# Altium PCB PCB1.PcbDoc
Units mm, origin at the board's own origin, x right, y up, seen from the top; angles counter-clockwise.
Board outline 64 x 26 mm, 2 copper layers (Top Layer, Bottom Layer); 3 components, 38 nets, 82 pads, 0 vias.
Unrouted connection lines stored in the file: 2.
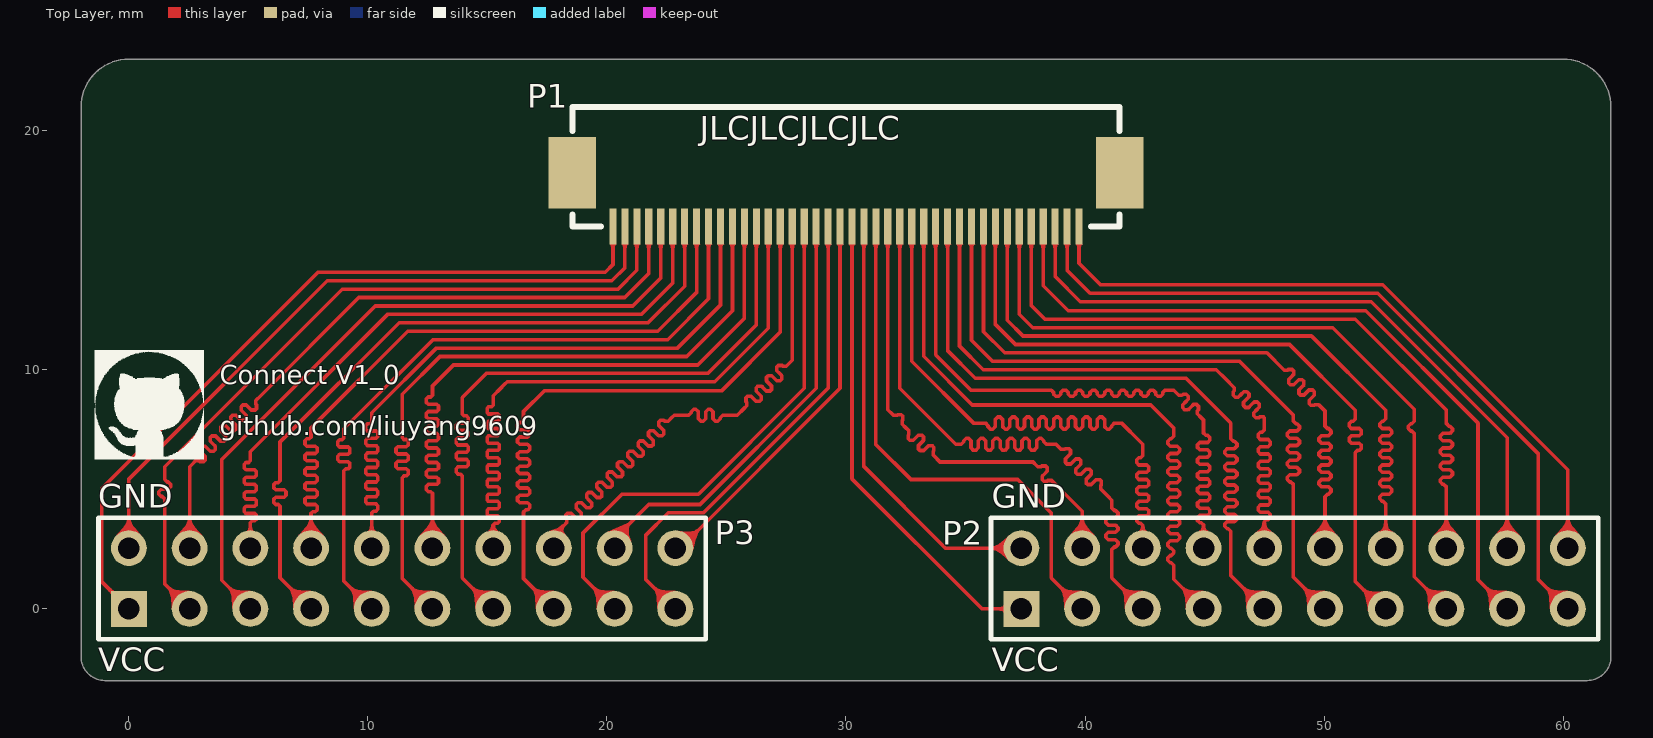
[diagram p0: Top Layer view]
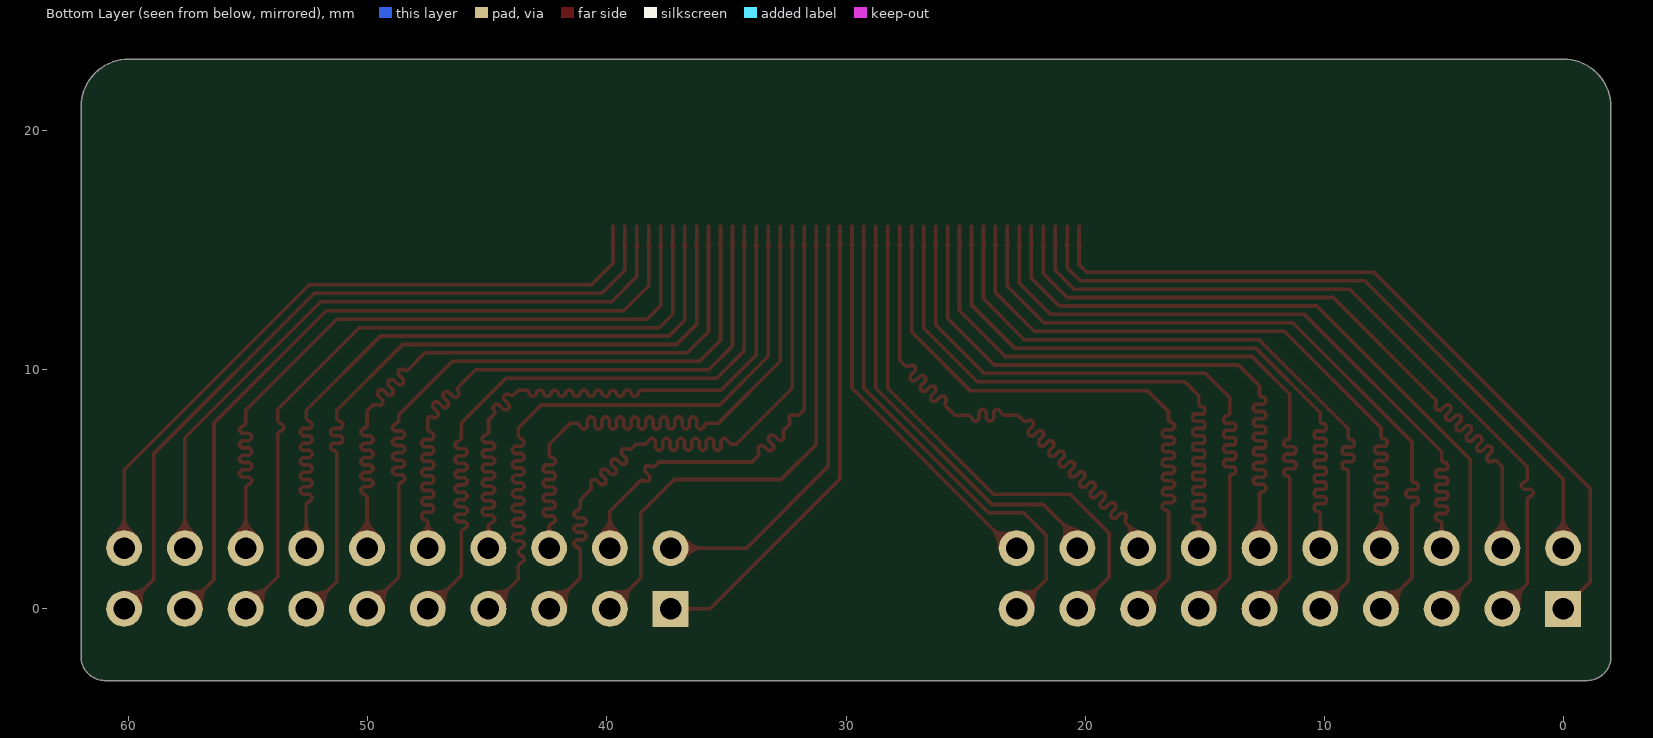
[diagram p1: Bottom Layer view, seen from below]

## Layer stack, top to bottom
Top Solder: solder mask 0.0102, Solder Resist, Dk 3.5
Top Layer: signal copper 0.0356
Dielectric 1: dielectric 0.32, FR-4, Dk 4.8
Bottom Layer: signal copper 0.0356
Bottom Solder: solder mask 0.0102, Solder Resist, Dk 3.5

## Board outline
-1,-3 cw(c-1,-2) -2,-2 -2,21 cw(c0,21) 0,23 60,23 cw(c60,21) 62,21 62,-2 cw(c61,-2) 61,-3

## Design rules (kind name [scope] priority, off if disabled: settings)
Clearance [All] p1: gap=0.2
Length LengthClass4 [InNetClass('Class4')] p1: maxlimit=23 minlimit=22
Length LengthClass3 [InNetClass('Class3')] p2: maxlimit=32 minlimit=31
Length LengthClass2 [InNetClass('Class2')] p3: maxlimit=33 minlimit=32
Length LengthClass1 [InNetClass('Class1')] p4: maxlimit=31 minlimit=30
PolygonConnect [All] p1: connectstyle=Relief reliefconductorwidth=0.254 reliefentries=4 polygonreliefangle="90 Angle" airgapwidth=0.254
RoutingVias [All] p1: holewidth=0.6 width=1 viastyle="Through Hole" minholewidth=0.711 minwidth=1.27 maxholewidth=0.711 maxwidth=1.27
SolderMaskExpansion [All] p1: expansion=0.102
Width [All] p1: maxlimit=0.762 minlimit=0.127 preferedwidth=0.152
30 further rules are at their usual default settings.

## Classes and differential pairs
net class Class1: LEFT_D0 LEFT_D1 LEFT_D2 LEFT_D3 LEFT_D4 LEFT_D5 LEFT_D6 LEFT_D7 LEFT_HREF LEFT_PCLK LEFT_SYNC LEFT_XCLK
net class Class2: LEFT_SCL LEFT_SDA
net class Class3: RIGHT_D0 RIGHT_D1 RIGHT_D2 RIGHT_D3 RIGHT_D4 RIGHT_D5 RIGHT_D6 RIGHT_D7 RIGHT_HREF RIGHT_PCLK RIGHT_SYNC RIGHT_XCLK
net class Class4: RIGHT_SCL RIGHT_SDA

## Components (designator, comment, footprint, x,y, rotation, side; value= is the part's Value field where it differs from the comment)
P1 "Header 20X2" FPC_40pin_05mm 20.25,16 r0 top
P2 "Header 10X2" HDR2X10 37.338,0 r0 top
P3 "Header 10X2" HDR2X10 0,0 r0 top

## Footprints (in the part's own frame and the unit in brackets; to place one, negate y for a bottom-side part, rotate by r counter-clockwise, add the part's x,y. Pads: shape width x height; smd on the part's side, far side on the other; paste and mask are expansions set on the pad)
FPC_40pin_05mm [mm]
  rect 2x3 smd: 0(-1.7,2.25) 0(21.2,2.25)
  rect 0.3x1.5 smd: 1(0,0) 2(0.5,0) 3(1,0) 4(1.5,0) 5(2,0) 6(2.5,0) 7(3,0) 8(3.5,0) 9(4,0) 10(4.5,0) 11(5,0) 12(5.5,0) 13(6,0) 14(6.5,0) 15(7,0) 16(7.5,0) 17(8,0) 18(8.5,0) 19(9,0) 20(9.5,0) 21(10,0) 22(10.5,0) 23(11,0) 24(11.5,0) 25(12,0) 26(12.5,0) 27(13,0) 28(13.5,0) 29(14,0) 30(14.5,0) 31(15,0) 32(15.5,0) 33(16,0) 34(16.5,0) 35(17,0) 36(17.5,0) 37(18,0) 38(18.5,0) 39(19,0) 40(19.5,0)
  silkscreen extent -1.7,0 21.2,5
HDR2X10 [mm] "Connector; Header; 10x2 Position"
  rect 1.5x1.5 hole 0.9: 1(0,0)
  round 1.5 hole 0.9: 2(0,2.54) 3(2.54,0) 4(2.54,2.54) 5(5.08,0) 6(5.08,2.54) 7(7.62,0) 8(7.62,2.54) 9(10.16,0) 10(10.16,2.54) 11(12.7,0) 12(12.7,2.54) 13(15.24,0) 14(15.24,2.54) 15(17.78,0) 16(17.78,2.54) 17(20.32,0) 18(20.32,2.54) 19(22.86,0) 20(22.86,2.54)
  silkscreen extent -1.27,-1.27 24.13,3.81

## Part data
P1: "Header, 20-Pin, Dual row"
P2 P3: "Header, 10-Pin, Dual row"

## Nets (pads, with @x,y where several pads share a name; then routed paths per layer and width w, separated by ;. In a path a pad name is that pad's centre, name@x,y a point inside that pad or via, vN(x,y) a via of type N, cw(c..) or ccw(c..) an arc to the next point about the centre after c; other vN are vias at no path point)
LEFT_D0: P1.16 P3.16 | length 30.3
  Top Layer w0.152: P3.16 17.78,3.073 18.186,3.48 18.315,3.609 18.315,3.76 18.287,3.788 18.287,3.939 18.351,4.004 18.502,4.004 18.606,3.9 18.711,3.796 18.861,3.796 18.926,3.86 18.926,4.011 18.822,4.115 18.718,4.22 18.718,4.37 18.782,4.435 18.933,4.435 19.037,4.331 19.142,4.227 19.293,4.227 19.357,4.291 19.357,4.442 19.253,4.546 19.149,4.651 19.149,4.801 19.214,4.866 19.364,4.866 19.469,4.762 19.573,4.658 19.724,4.658 19.788,4.722 19.788,4.873 19.684,4.977 19.58,5.082 19.58,5.233 19.645,5.297 19.795,5.297 19.9,5.193 20.004,5.089 20.155,5.089 20.219,5.153 20.219,5.304 20.115,5.409 20.011,5.513 20.011,5.664 20.076,5.728 20.226,5.728 20.331,5.624 20.435,5.52 20.586,5.52 20.65,5.585 20.65,5.735 20.546,5.84 20.442,5.944 20.442,6.095 20.507,6.159 20.658,6.159 20.762,6.055 20.866,5.951 21.017,5.951 21.081,6.016 21.081,6.166 20.977,6.271 20.873,6.375 20.873,6.526 20.938,6.59 21.089,6.59 21.193,6.486 21.297,6.382 21.448,6.382 21.512,6.447 21.512,6.598 21.408,6.702 21.304,6.806 21.304,6.957 21.369,7.021 21.52,7.021 21.624,6.917 21.728,6.813 21.879,6.813 21.944,6.878 21.944,7.029 21.839,7.133 21.735,7.237 21.735,7.388 21.8,7.452 21.951,7.452 22.055,7.348 22.159,7.244 22.31,7.244 22.375,7.309 22.375,7.46 22.27,7.564 22.166,7.668 22.166,7.819 22.231,7.883 22.382,7.883 22.41,7.855 22.561,7.855 22.701,7.995 22.809,8.103 23.368,8.103 23.414,8.103 23.52,8.209 23.52,8.25 23.627,8.357 23.719,8.357 23.825,8.25 23.825,8.103 23.825,7.955 23.932,7.849 24.023,7.849 24.13,7.955 24.13,8.103 24.13,8.25 24.237,8.357 24.328,8.357 24.435,8.25 24.435,8.103 24.435,7.955 24.541,7.849 24.633,7.849 24.74,7.955 24.74,7.996 24.846,8.103 25.121,8.103 25.451,8.103 25.73,8.382 25.843,8.494 25.843,8.645 25.814,8.674 25.814,8.825 25.879,8.89 26.029,8.89 26.134,8.785 26.238,8.681 26.389,8.681 26.453,8.746 26.453,8.897 26.349,9.001 26.245,9.105 26.245,9.256 26.31,9.321 26.46,9.321 26.565,9.216 26.669,9.112 26.82,9.112 26.884,9.177 26.884,9.328 26.78,9.432 26.676,9.536 26.676,9.687 26.741,9.752 26.891,9.752 26.996,9.647 27.1,9.543 27.251,9.543 27.315,9.608 27.315,9.759 27.211,9.863 27.107,9.967 27.107,10.118 27.172,10.183 27.323,10.183 27.351,10.154 27.502,10.154 27.642,10.294 27.75,10.402 P1.16
LEFT_D1: P1.15 P3.15 | length 30
  Top Layer w0.152: P3.15 16.51,1.27 16.51,2.667 16.51,4.049 16.601,4.14 16.673,4.14 16.764,4.232 16.764,4.354 16.673,4.445 16.51,4.445 16.347,4.445 16.256,4.536 16.256,4.658 16.347,4.75 16.51,4.75 16.673,4.75 16.764,4.841 16.764,4.963 16.673,5.055 16.51,5.055 16.347,5.055 16.256,5.146 16.256,5.268 16.347,5.359 16.51,5.359 16.673,5.359 16.764,5.451 16.764,5.573 16.673,5.664 16.51,5.664 16.347,5.664 16.256,5.756 16.256,5.878 16.347,5.969 16.51,5.969 16.673,5.969 16.764,6.06 16.764,6.182 16.673,6.274 16.51,6.274 16.347,6.274 16.256,6.365 16.256,6.487 16.347,6.579 16.51,6.579 16.673,6.579 16.764,6.67 16.764,6.792 16.673,6.883 16.51,6.883 16.347,6.883 16.256,6.975 16.256,7.097 16.347,7.188 16.51,7.188 16.673,7.188 16.764,7.28 16.764,7.402 16.673,7.493 16.51,7.493 16.347,7.493 16.256,7.584 16.256,7.706 16.347,7.798 16.419,7.798 16.51,7.889 16.51,8.103 16.51,8.255 17.374,9.119 24.79,9.119 27.25,11.578 P1.15
LEFT_D2: P1.14 P3.14 | length 30.2
  Top Layer w0.152: P3.14 15.24,3.099 15.24,3.52 15.301,3.581 15.433,3.581 15.494,3.642 15.494,3.825 15.433,3.886 15.24,3.886 15.047,3.886 14.986,3.947 14.986,4.13 15.047,4.191 15.24,4.191 15.433,4.191 15.494,4.252 15.494,4.435 15.433,4.496 15.24,4.496 15.047,4.496 14.986,4.557 14.986,4.74 15.047,4.801 15.24,4.801 15.433,4.801 15.494,4.862 15.494,5.044 15.433,5.105 15.24,5.105 15.047,5.105 14.986,5.166 14.986,5.349 15.047,5.41 15.24,5.41 15.433,5.41 15.494,5.471 15.494,5.654 15.433,5.715 15.24,5.715 15.047,5.715 14.986,5.776 14.986,5.959 15.047,6.02 15.24,6.02 15.433,6.02 15.494,6.081 15.494,6.264 15.433,6.325 15.24,6.325 15.047,6.325 14.986,6.386 14.986,6.568 15.047,6.629 15.24,6.629 15.433,6.629 15.494,6.69 15.494,6.873 15.433,6.934 15.24,6.934 15.047,6.934 14.986,6.995 14.986,7.178 15.047,7.239 15.24,7.239 15.433,7.239 15.494,7.3 15.494,7.483 15.433,7.544 15.24,7.544 15.047,7.544 14.986,7.605 14.986,7.788 15.047,7.849 15.24,7.849 15.433,7.849 15.494,7.91 15.494,8.092 15.433,8.153 15.24,8.153 15.047,8.153 14.986,8.214 14.986,8.397 15.047,8.458 15.179,8.458 15.24,8.519 15.24,8.763 15.24,8.915 15.285,8.961 15.501,9.176 15.716,9.392 15.824,9.5 24.511,9.5 26.75,11.739 P1.14
LEFT_D3: P1.13 P3.13 | length 30.3
  Top Layer w0.152: P3.13 13.945,1.295 13.945,2.21 13.945,5.563 13.868,5.639 13.767,5.639 13.691,5.715 13.691,5.867 13.767,5.944 13.945,5.944 14.122,5.944 14.199,6.02 14.199,6.172 14.122,6.248 13.945,6.248 13.767,6.248 13.691,6.325 13.691,6.477 13.767,6.553 13.945,6.553 14.122,6.553 14.199,6.629 14.199,6.782 14.122,6.858 13.945,6.858 13.767,6.858 13.691,6.934 13.691,7.087 13.767,7.163 13.945,7.163 14.122,7.163 14.199,7.239 14.199,7.391 14.122,7.468 13.945,7.468 13.767,7.468 13.691,7.544 13.691,7.696 13.767,7.772 13.945,7.772 14.122,7.772 14.199,7.849 14.199,8.001 14.122,8.077 14.021,8.077 13.945,8.153 13.945,8.382 13.945,8.687 13.945,8.839 14.957,9.852 24.228,9.852 26.25,11.874 P1.13
LEFT_D4: P1.12 P3.12 | length 30.2
  Top Layer w0.152: P3.12 12.7,3.835 12.7,4.826 12.624,4.902 12.522,4.902 12.446,4.978 12.446,5.131 12.522,5.207 12.7,5.207 12.878,5.207 12.954,5.283 12.954,5.436 12.878,5.512 12.7,5.512 12.522,5.512 12.446,5.588 12.446,5.74 12.522,5.817 12.7,5.817 12.878,5.817 12.954,5.893 12.954,6.045 12.878,6.121 12.7,6.121 12.522,6.121 12.446,6.198 12.446,6.35 12.522,6.426 12.7,6.426 12.878,6.426 12.954,6.502 12.954,6.655 12.878,6.731 12.7,6.731 12.522,6.731 12.446,6.807 12.446,6.96 12.522,7.036 12.7,7.036 12.878,7.036 12.954,7.112 12.954,7.264 12.878,7.341 12.7,7.341 12.522,7.341 12.446,7.417 12.446,7.569 12.522,7.645 12.7,7.645 12.878,7.645 12.954,7.722 12.954,7.874 12.878,7.95 12.7,7.95 12.522,7.95 12.446,8.026 12.446,8.179 12.522,8.255 12.7,8.255 12.878,8.255 12.954,8.331 12.954,8.484 12.878,8.56 12.7,8.56 12.522,8.56 12.446,8.636 12.446,8.788 12.522,8.865 12.624,8.865 12.7,8.941 12.7,9.169 12.7,9.322 13.583,10.204 23.793,10.204 25.75,12.161 P1.12
LEFT_D5: P1.11 P3.11 | length 30.3
  Top Layer w0.152: P3.11 11.43,1.27 11.43,4.013 11.43,5.486 11.506,5.563 11.608,5.563 11.684,5.639 11.684,5.791 11.608,5.867 11.43,5.867 11.252,5.867 11.176,5.944 11.176,6.096 11.252,6.172 11.43,6.172 11.608,6.172 11.684,6.248 11.684,6.401 11.608,6.477 11.43,6.477 11.252,6.477 11.176,6.553 11.176,6.706 11.252,6.782 11.43,6.782 11.608,6.782 11.684,6.858 11.684,7.01 11.608,7.087 11.506,7.087 11.43,7.163 11.43,7.239 11.43,8.973 13.014,10.557 23.333,10.557 25.25,12.474 P1.11
LEFT_D6: P1.10 P3.10 | length 30.3
  Top Layer w0.152: P3.10 10.16,3.429 10.16,4.011 10.236,4.087 10.338,4.087 10.414,4.163 10.414,4.315 10.338,4.392 10.16,4.392 9.982,4.392 9.906,4.468 9.906,4.62 9.982,4.696 10.16,4.696 10.338,4.696 10.414,4.773 10.414,4.925 10.338,5.001 10.16,5.001 9.982,5.001 9.906,5.077 9.906,5.23 9.982,5.306 10.16,5.306 10.338,5.306 10.414,5.382 10.414,5.535 10.338,5.611 10.16,5.611 9.982,5.611 9.906,5.687 9.906,5.839 9.982,5.916 10.16,5.916 10.338,5.916 10.414,5.992 10.414,6.144 10.338,6.22 10.16,6.22 9.982,6.22 9.906,6.297 9.906,6.449 9.982,6.525 10.16,6.525 10.338,6.525 10.414,6.601 10.414,6.754 10.338,6.83 10.16,6.83 9.982,6.83 9.906,6.906 9.906,7.059 9.982,7.135 10.16,7.135 10.338,7.135 10.414,7.211 10.414,7.363 10.338,7.44 10.16,7.44 9.982,7.44 9.906,7.516 9.906,7.668 9.982,7.744 10.084,7.744 10.16,7.821 10.16,8.049 10.16,8.202 12.868,10.909 22.949,10.909 24.75,12.71 P1.10
LEFT_D7: P1.9 P3.9 | length 30.1
  Top Layer w0.152: P3.9 8.992,1.168 8.992,2.718 8.992,5.779 9.068,5.855 9.169,5.855 9.246,5.931 9.246,6.084 9.169,6.16 8.992,6.16 8.814,6.16 8.738,6.236 8.738,6.389 8.814,6.465 8.992,6.465 9.169,6.465 9.246,6.541 9.246,6.693 9.169,6.77 8.992,6.77 8.814,6.77 8.738,6.846 8.738,6.998 8.814,7.074 8.915,7.074 8.992,7.151 8.992,7.379 8.992,7.532 12.722,11.262 22.539,11.262 24.25,12.972 P1.9
LEFT_GND: P1.2 P1.17 P3.2 P3.17 | length 51.3
  Top Layer w0.152: P3.2 0,5.436 8.293,13.728 20.205,13.728 20.75,14.273 P1.2 ; P3.17 18.999,1.321 18.999,3.175 20.625,4.801 23.825,4.801 28.25,9.225 P1.17
LEFT_HREF: P1.6 P3.6 | length 30.3
  Top Layer w0.152: P3.6 5.08,3.404 5.08,3.607 5.156,3.683 5.258,3.683 5.334,3.759 5.334,3.912 5.258,3.988 5.08,3.988 4.902,3.988 4.826,4.064 4.826,4.216 4.902,4.293 5.08,4.293 5.258,4.293 5.334,4.369 5.334,4.521 5.258,4.597 5.08,4.597 4.902,4.597 4.826,4.674 4.826,4.826 4.902,4.902 5.08,4.902 5.258,4.902 5.334,4.978 5.334,5.131 5.258,5.207 5.08,5.207 4.902,5.207 4.826,5.283 4.826,5.436 4.902,5.512 5.08,5.512 5.258,5.512 5.334,5.588 5.334,5.74 5.258,5.817 5.08,5.817 4.902,5.817 4.826,5.893 4.826,6.045 4.902,6.121 5.004,6.121 5.08,6.198 5.08,6.426 5.08,6.579 10.82,12.319 21.437,12.319 22.75,13.631 P1.6
LEFT_NC1: P1.18 P3.18 | length 18.2
  Top Layer w0.152: P3.18 20.32,2.946 21.742,4.369 23.892,4.369 28.75,9.227 P1.18
LEFT_NC2: P1.19 P3.19 | length 20.5
  Top Layer w0.152: P3.19 21.615,1.245 21.615,3.073 22.558,4.016 24.038,4.016 29.25,9.229 P1.19
LEFT_NC3: P1.20 P3.20 | length 16.4
  Top Layer w0.152: P3.20 23.063,2.54 29.75,9.227 P1.20
LEFT_PCLK: P1.7 P3.7 | length 30.8
  Top Layer w0.152: P3.7 6.321,1.299 6.321,2.54 6.321,4.293 6.245,4.369 6.143,4.369 6.067,4.445 6.067,4.597 6.143,4.674 6.321,4.674 6.499,4.674 6.575,4.75 6.575,4.902 6.499,4.978 6.321,4.978 6.143,4.978 6.067,5.055 6.067,5.207 6.143,5.283 6.245,5.283 6.321,5.359 6.321,5.588 6.321,5.74 6.321,6.982 11.306,11.966 21.72,11.966 23.25,13.496 P1.7
LEFT_SCL: P1.3 P3.3 | length 32
  Top Layer w0.152: P3.3 1.499,1.041 1.499,3.708 1.499,4.592 1.392,4.699 1.351,4.699 1.245,4.806 1.245,4.897 1.351,5.004 1.499,5.004 1.646,5.004 1.753,5.11 1.753,5.202 1.646,5.309 1.605,5.309 1.499,5.415 1.499,5.461 1.499,5.944 8.931,13.376 20.463,13.376 21.25,14.163 P1.3
LEFT_SDA: P1.4 P3.4 | length 32
  Top Layer w0.152: P3.4 2.54,5.944 2.648,6.051 2.788,6.191 2.939,6.191 2.967,6.163 3.118,6.163 3.183,6.227 3.183,6.378 3.079,6.482 2.975,6.587 2.975,6.737 3.039,6.802 3.19,6.802 3.294,6.698 3.399,6.594 3.549,6.594 3.614,6.658 3.614,6.809 3.51,6.913 3.406,7.018 3.406,7.169 3.47,7.233 3.621,7.233 3.725,7.129 3.83,7.025 3.98,7.025 4.045,7.089 4.045,7.24 3.941,7.345 3.837,7.449 3.837,7.6 3.901,7.664 4.052,7.664 4.156,7.56 4.261,7.456 4.411,7.456 4.476,7.521 4.476,7.671 4.372,7.776 4.268,7.88 4.268,8.031 4.332,8.095 4.483,8.095 4.587,7.991 4.692,7.887 4.843,7.887 4.907,7.952 4.907,8.102 4.803,8.207 4.699,8.311 4.699,8.462 4.764,8.526 4.914,8.526 5.019,8.422 5.123,8.318 5.274,8.318 5.338,8.383 5.338,8.534 5.31,8.562 5.31,8.713 5.512,8.915 9.62,13.024 20.745,13.024 21.75,14.028 P1.4
LEFT_SYNC: P1.5 P3.5 | length 30.4
  Top Layer w0.152: P3.5 3.886,1.194 3.886,6.248 10.309,12.671 21.079,12.671 22.25,13.843 P1.5
LEFT_VCC: P1.1 P3.1 | length 32.4
  Top Layer w0.152: P3.1 -1.143,1.143 -1.143,5.029 7.909,14.081 19.923,14.081 20.25,14.408 P1.1
LEFT_XCLK: P1.8 P3.8 | length 30.4
  Top Layer w0.152: P3.8 7.62,3.226 7.62,3.988 7.696,4.064 7.798,4.064 7.874,4.14 7.874,4.293 7.798,4.369 7.62,4.369 7.442,4.369 7.366,4.445 7.366,4.597 7.442,4.674 7.62,4.674 7.798,4.674 7.874,4.75 7.874,4.902 7.798,4.978 7.62,4.978 7.442,4.978 7.366,5.055 7.366,5.207 7.442,5.283 7.62,5.283 7.798,5.283 7.874,5.359 7.874,5.512 7.798,5.588 7.62,5.588 7.442,5.588 7.366,5.664 7.366,5.817 7.442,5.893 7.62,5.893 7.798,5.893 7.874,5.969 7.874,6.121 7.798,6.198 7.62,6.198 7.442,6.198 7.366,6.274 7.366,6.426 7.442,6.502 7.62,6.502 7.798,6.502 7.874,6.579 7.874,6.731 7.798,6.807 7.62,6.807 7.442,6.807 7.366,6.883 7.366,7.036 7.442,7.112 7.544,7.112 7.62,7.188 7.62,7.417 7.62,7.569 11.665,11.614 22.13,11.614 23.75,13.234 P1.8
RIGHT_D0: P1.36 P2.16 | length 31.2
  Top Layer w0.152: P1.36 37.75,12.694 38.326,12.119 51.305,12.119 55.118,8.306 55.118,7.798 55.118,7.752 55.225,7.645 55.265,7.645 55.372,7.539 55.372,7.447 55.265,7.341 55.118,7.341 54.971,7.341 54.864,7.234 54.864,7.142 54.971,7.036 55.118,7.036 55.265,7.036 55.372,6.929 55.372,6.838 55.265,6.731 55.118,6.731 54.971,6.731 54.864,6.624 54.864,6.533 54.971,6.426 55.118,6.426 55.265,6.426 55.372,6.32 55.372,6.228 55.265,6.121 55.118,6.121 54.971,6.121 54.864,6.015 54.864,5.923 54.971,5.817 55.118,5.817 55.265,5.817 55.372,5.71 55.372,5.618 55.265,5.512 55.118,5.512 54.971,5.512 54.864,5.405 54.864,5.314 54.971,5.207 55.011,5.207 55.118,5.1 55.118,4.267 P2.16
RIGHT_D1: P1.35 P2.15 | length 31
  Top Layer w0.152: P1.35 37.25,12.331 37.814,11.766 50.362,11.766 53.772,8.357 53.772,8.204 53.772,8.052 53.772,7.854 53.665,7.747 53.624,7.747 53.518,7.64 53.518,7.549 53.624,7.442 53.665,7.442 53.772,7.336 53.772,5.207 53.772,1.346 P2.15
RIGHT_D2: P1.34 P2.14 | length 31.2
  Top Layer w0.152: P1.34@36.75,16 36.75,12.069 37.405,11.414 49.47,11.414 52.578,8.306 52.578,8.153 52.578,7.955 52.471,7.849 52.431,7.849 52.324,7.742 52.324,7.65 52.431,7.544 52.578,7.544 52.725,7.544 52.832,7.437 52.832,7.346 52.725,7.239 52.578,7.239 52.431,7.239 52.324,7.132 52.324,7.041 52.431,6.934 52.578,6.934 52.725,6.934 52.832,6.828 52.832,6.736 52.725,6.629 52.578,6.629 52.431,6.629 52.324,6.523 52.324,6.431 52.431,6.325 52.578,6.325 52.725,6.325 52.832,6.218 52.832,6.126 52.725,6.02 52.578,6.02 52.431,6.02 52.324,5.913 52.324,5.822 52.431,5.715 52.578,5.715 52.725,5.715 52.832,5.608 52.832,5.517 52.725,5.41 52.578,5.41 52.431,5.41 52.324,5.304 52.324,5.212 52.431,5.105 52.578,5.105 52.725,5.105 52.832,4.999 52.832,4.907 52.725,4.801 52.578,4.801 52.431,4.801 52.324,4.694 52.324,4.602 52.431,4.496 52.471,4.496 52.578,4.389 52.578,3.556 P2.14
RIGHT_D3: P1.33 P2.13 | length 31.1
  Top Layer w0.152: P1.33 36.25,11.899 37.087,11.062 48.552,11.062 51.308,8.306 51.308,8.153 51.308,7.94 51.217,7.849 51.145,7.849 51.054,7.757 51.054,7.635 51.145,7.544 51.308,7.544 51.471,7.544 51.562,7.452 51.562,7.33 51.471,7.239 51.308,7.239 51.145,7.239 51.054,7.148 51.054,7.026 51.145,6.934 51.308,6.934 51.471,6.934 51.562,6.843 51.562,6.721 51.471,6.629 51.399,6.629 51.308,6.538 51.308,4.648 51.308,1.143 52.451,0 P2.13
RIGHT_D4: P1.32 P2.12 | length 31.3
  Top Layer w0.152: P1.32 35.75,11.596 36.636,10.709 47.609,10.709 48.298,10.02 48.33,9.988 48.481,9.988 48.51,10.017 48.661,10.017 48.726,9.952 48.726,9.801 48.621,9.697 48.517,9.593 48.517,9.442 48.582,9.377 48.733,9.377 48.837,9.481 48.941,9.586 49.092,9.586 49.157,9.521 49.157,9.37 49.052,9.266 48.948,9.162 48.948,9.011 49.013,8.946 49.164,8.946 49.268,9.05 49.372,9.155 49.523,9.155 49.588,9.09 49.588,8.939 49.483,8.835 49.379,8.731 49.379,8.58 49.444,8.515 49.595,8.515 49.624,8.544 49.774,8.544 49.809,8.509 50.038,8.28 50.038,7.696 50.038,7.65 50.145,7.544 50.185,7.544 50.292,7.437 50.292,7.346 50.185,7.239 50.038,7.239 49.891,7.239 49.784,7.132 49.784,7.041 49.891,6.934 50.038,6.934 50.185,6.934 50.292,6.828 50.292,6.736 50.185,6.629 50.038,6.629 49.891,6.629 49.784,6.523 49.784,6.431 49.891,6.325 50.038,6.325 50.185,6.325 50.292,6.218 50.292,6.126 50.185,6.02 50.038,6.02 49.891,6.02 49.784,5.913 49.784,5.822 49.891,5.715 50.038,5.715 50.185,5.715 50.292,5.608 50.292,5.517 50.185,5.41 50.038,5.41 49.891,5.41 49.784,5.304 49.784,5.212 49.891,5.105 50.038,5.105 50.185,5.105 50.292,4.999 50.292,4.907 50.185,4.801 50.145,4.801 50.038,4.694 50.038,4.267 P2.12
RIGHT_D5: P1.31 P2.11 | length 31.1
  Top Layer w0.152: P1.31 35.25,11.232 36.125,10.357 46.463,10.357 48.717,8.103 48.717,7.899 48.717,7.854 48.824,7.747 48.865,7.747 48.971,7.64 48.971,7.549 48.865,7.442 48.717,7.442 48.57,7.442 48.463,7.336 48.463,7.244 48.57,7.137 48.717,7.137 48.865,7.137 48.971,7.031 48.971,6.939 48.865,6.833 48.717,6.833 48.57,6.833 48.463,6.726 48.463,6.634 48.57,6.528 48.717,6.528 48.865,6.528 48.971,6.421 48.971,6.33 48.865,6.223 48.717,6.223 48.57,6.223 48.463,6.116 48.463,6.025 48.57,5.918 48.717,5.918 48.865,5.918 48.971,5.812 48.971,5.72 48.865,5.613 48.717,5.613 48.57,5.613 48.463,5.507 48.463,5.415 48.57,5.309 48.611,5.309 48.717,5.202 48.717,2.946 48.717,1.321 P2.11
RIGHT_D6: P1.30 P2.10 | length 31.1
  Top Layer w0.152: P1.30 34.75,10.995 35.741,10.004 45.495,10.004 45.872,9.627 46.248,9.251 46.248,9.122 46.198,9.071 46.198,8.942 46.284,8.856 46.413,8.856 46.528,8.971 46.643,9.086 46.772,9.086 46.859,9 46.859,8.87 46.744,8.755 46.629,8.64 46.629,8.511 46.715,8.425 46.844,8.425 46.959,8.54 47.074,8.655 47.203,8.655 47.29,8.569 47.29,8.439 47.175,8.324 47.06,8.209 47.06,8.08 47.146,7.994 47.275,7.994 47.326,8.044 47.455,8.044 47.498,8.001 47.498,7.849 47.498,7.696 47.498,7.483 47.407,7.391 47.335,7.391 47.244,7.3 47.244,7.178 47.335,7.087 47.498,7.087 47.661,7.087 47.752,6.995 47.752,6.873 47.661,6.782 47.498,6.782 47.335,6.782 47.244,6.69 47.244,6.568 47.335,6.477 47.498,6.477 47.661,6.477 47.752,6.386 47.752,6.264 47.661,6.172 47.498,6.172 47.335,6.172 47.244,6.081 47.244,5.959 47.335,5.867 47.498,5.867 47.661,5.867 47.752,5.776 47.752,5.654 47.661,5.563 47.498,5.563 47.335,5.563 47.244,5.471 47.244,5.349 47.335,5.258 47.498,5.258 47.661,5.258 47.752,5.166 47.752,5.044 47.661,4.953 47.498,4.953 47.335,4.953 47.244,4.862 47.244,4.74 47.335,4.648 47.498,4.648 47.661,4.648 47.752,4.557 47.752,4.435 47.661,4.343 47.498,4.343 47.335,4.343 47.244,4.252 47.244,4.13 47.335,4.039 47.498,4.039 47.661,4.039 47.752,3.947 47.752,3.825 47.661,3.734 47.589,3.734 47.498,3.642 47.498,3.607 P2.10
RIGHT_D7: P1.29 P2.9 | length 31.1
  Top Layer w0.152: P1.29 34.25,10.81 35.408,9.652 44.221,9.652 46.101,7.772 46.101,7.62 46.101,7.315 46.101,7.117 46.208,7.01 46.248,7.01 46.355,6.904 46.355,6.812 46.248,6.706 46.101,6.706 45.954,6.706 45.847,6.599 45.847,6.507 45.954,6.401 46.101,6.401 46.248,6.401 46.355,6.294 46.355,6.203 46.248,6.096 46.101,6.096 45.954,6.096 45.847,5.989 45.847,5.898 45.954,5.791 46.101,5.791 46.248,5.791 46.355,5.685 46.355,5.593 46.248,5.486 46.101,5.486 45.954,5.486 45.847,5.38 45.847,5.288 45.954,5.182 46.101,5.182 46.248,5.182 46.355,5.075 46.355,4.983 46.248,4.877 46.101,4.877 45.954,4.877 45.847,4.77 45.847,4.679 45.954,4.572 46.101,4.572 46.248,4.572 46.355,4.465 46.355,4.374 46.248,4.267 46.101,4.267 45.954,4.267 45.847,4.161 45.847,4.069 45.954,3.962 46.101,3.962 46.248,3.962 46.355,3.856 46.355,3.764 46.248,3.658 46.101,3.658 45.954,3.658 45.847,3.551 45.847,3.459 45.954,3.353 45.994,3.353 46.101,3.246 46.101,2.083 46.101,1.397 P2.9
RIGHT_GND: P1.22 P1.37 P2.2 P2.17 | length 49.4
  Top Layer w0.152: P1.22 30.75,5.953 34.163,2.54 P2.2 ; P1.37 38.25,13.515 39.294,12.471 51.74,12.471 56.439,7.772 56.439,1.219 P2.17
RIGHT_HREF: P1.26 P2.6 | length 31
  Top Layer w0.152: P1.26 32.75,10.354 35.331,7.772 35.484,7.772 35.636,7.772 35.834,7.772 35.941,7.666 35.941,7.625 36.048,7.518 36.139,7.518 36.246,7.625 36.246,7.772 36.246,7.92 36.352,8.026 36.444,8.026 36.551,7.92 36.551,7.772 36.551,7.625 36.657,7.518 36.749,7.518 36.855,7.625 36.855,7.772 36.855,7.92 36.962,8.026 37.054,8.026 37.16,7.92 37.16,7.772 37.16,7.625 37.267,7.518 37.358,7.518 37.465,7.625 37.465,7.772 37.465,7.92 37.572,8.026 37.663,8.026 37.77,7.92 37.77,7.772 37.77,7.625 37.876,7.518 37.968,7.518 38.075,7.625 38.075,7.772 38.075,7.92 38.181,8.026 38.273,8.026 38.379,7.92 38.379,7.772 38.379,7.625 38.486,7.518 38.578,7.518 38.684,7.625 38.684,7.772 38.684,7.92 38.791,8.026 38.882,8.026 38.989,7.92 38.989,7.772 38.989,7.625 39.096,7.518 39.187,7.518 39.294,7.625 39.294,7.772 39.294,7.92 39.4,8.026 39.492,8.026 39.599,7.92 39.599,7.772 39.599,7.625 39.705,7.518 39.797,7.518 39.903,7.625 39.903,7.772 39.903,7.92 40.01,8.026 40.102,8.026 40.208,7.92 40.208,7.772 40.208,7.625 40.315,7.518 40.406,7.518 40.513,7.625 40.513,7.772 40.513,7.92 40.62,8.026 40.711,8.026 40.818,7.92 40.818,7.772 40.818,7.625 40.924,7.518 41.016,7.518 41.123,7.625 41.123,7.666 41.229,7.772 41.427,7.772 41.453,7.772 41.529,7.772 42.31,6.991 ; 42.355,6.947 42.31,6.991 ; P2.6 42.418,3.429 42.418,3.49 42.327,3.581 42.255,3.581 42.164,3.673 42.164,3.795 42.255,3.886 42.418,3.886 42.581,3.886 42.672,3.978 42.672,4.1 42.581,4.191 42.418,4.191 42.255,4.191 42.164,4.282 42.164,4.404 42.255,4.496 42.418,4.496 42.581,4.496 42.672,4.587 42.672,4.709 42.581,4.801 42.418,4.801 42.255,4.801 42.164,4.892 42.164,5.014 42.255,5.105 42.418,5.105 42.581,5.105 42.672,5.197 42.672,5.319 42.581,5.41 42.418,5.41 42.255,5.41 42.164,5.502 42.164,5.624 42.255,5.715 42.418,5.715 42.581,5.715 42.672,5.806 42.672,5.928 42.581,6.02 42.418,6.02 42.255,6.02 42.164,6.111 42.164,6.233 42.255,6.325 42.327,6.325 42.418,6.416 42.418,6.883 42.31,6.991
RIGHT_NC1: P1.38 P2.18 | length 28.4
  Top Layer w0.152: P1.38 38.75,13.904 39.802,12.852 51.968,12.852 57.658,7.163 P2.18
RIGHT_NC2: P1.39 P2.19 | length 31.7
  Top Layer w0.152: P1.39 39.25,14.166 40.211,13.205 52.251,13.205 58.953,6.502 58.953,1.245 P2.19
RIGHT_NC3: P1.40 P2.20 | length 28.8
  Top Layer w0.152: P1.40 39.75,14.454 40.646,13.557 52.457,13.557 60.198,5.817 P2.20
RIGHT_PCLK: P1.27 P2.7 | length 31.1
  Top Layer w0.152: P1.27 33.25,10.565 35.287,8.528 42.755,8.528 43.713,7.569 43.713,7.417 43.713,7.219 43.607,7.112 43.566,7.112 43.459,7.005 43.459,6.914 43.566,6.807 43.713,6.807 43.861,6.807 43.967,6.701 43.967,6.609 43.861,6.502 43.713,6.502 43.566,6.502 43.459,6.396 43.459,6.304 43.566,6.198 43.713,6.198 43.861,6.198 43.967,6.091 43.967,5.999 43.861,5.893 43.713,5.893 43.566,5.893 43.459,5.786 43.459,5.695 43.566,5.588 43.713,5.588 43.861,5.588 43.967,5.481 43.967,5.39 43.861,5.283 43.713,5.283 43.566,5.283 43.459,5.177 43.459,5.085 43.566,4.978 43.713,4.978 43.861,4.978 43.967,4.872 43.967,4.78 43.861,4.674 43.713,4.674 43.566,4.674 43.459,4.567 43.459,4.475 43.566,4.369 43.713,4.369 43.861,4.369 43.967,4.262 43.967,4.171 43.861,4.064 43.713,4.064 43.566,4.064 43.459,3.957 43.459,3.866 43.566,3.759 43.713,3.759 43.861,3.759 43.967,3.653 43.967,3.561 43.861,3.454 43.713,3.454 43.566,3.454 43.459,3.348 43.459,3.256 43.566,3.15 43.713,3.15 43.861,3.15 43.967,3.043 43.967,2.951 43.861,2.845 43.713,2.845 43.566,2.845 43.459,2.738 43.459,2.647 43.566,2.54 43.607,2.54 43.713,2.433 43.713,2.342 43.607,2.235 43.566,2.235 43.459,2.129 43.459,2.037 43.566,1.93 43.607,1.93 43.713,1.824 43.713,1.778 43.713,1.245 P2.7
RIGHT_SCL: P1.23 P2.3 | length 22.2
  Top Layer w0.152: P1.23 31.25,6.875 32.715,5.41 37.186,5.41 38.583,4.013 38.583,1.295 P2.3
RIGHT_SDA: P1.24 P2.4 | length 21.4
  Top Layer w0.152: P1.24 31.75,8.331 31.953,8.128 31.986,8.096 32.136,8.096 32.165,8.124 32.316,8.124 32.381,8.06 32.381,7.909 32.352,7.88 32.352,7.729 32.492,7.589 32.632,7.449 32.632,7.298 32.603,7.269 32.603,7.119 32.668,7.054 32.819,7.054 32.923,7.158 33.027,7.262 33.178,7.262 33.243,7.198 33.243,7.047 33.139,6.943 33.034,6.838 33.034,6.688 33.099,6.623 33.25,6.623 33.354,6.727 33.458,6.831 33.609,6.831 33.674,6.767 33.674,6.616 33.645,6.587 33.645,6.436 33.785,6.296 33.807,6.274 33.934,6.147 37.821,6.147 37.986,5.982 38.018,5.949 38.169,5.949 38.198,5.978 38.349,5.978 38.413,5.913 38.413,5.763 38.309,5.658 38.205,5.554 38.205,5.403 38.269,5.339 38.42,5.339 38.449,5.367 38.6,5.367 39.357,4.61 39.878,4.089 P2.4
RIGHT_SYNC: P1.25 P2.5 | length 31.1
  Top Layer w0.152: P1.25 32.25,9.228 34.595,6.883 34.773,6.883 34.818,6.883 34.925,6.99 34.925,7.031 35.032,7.137 35.123,7.137 35.23,7.031 35.23,6.883 35.23,6.736 35.336,6.629 35.428,6.629 35.535,6.736 35.535,6.883 35.535,7.031 35.641,7.137 35.733,7.137 35.839,7.031 35.839,6.883 35.839,6.736 35.946,6.629 36.038,6.629 36.144,6.736 36.144,6.883 36.144,7.031 36.251,7.137 36.342,7.137 36.449,7.031 36.449,6.883 36.449,6.736 36.556,6.629 36.647,6.629 36.754,6.736 36.754,6.883 36.754,7.031 36.86,7.137 36.952,7.137 37.059,7.031 37.059,6.883 37.059,6.736 37.165,6.629 37.257,6.629 37.363,6.736 37.363,6.883 37.363,7.031 37.47,7.137 37.562,7.137 37.668,7.031 37.668,6.883 37.668,6.736 37.775,6.629 37.866,6.629 37.973,6.736 37.973,6.883 37.973,7.031 38.08,7.137 38.171,7.137 38.278,7.031 38.278,6.99 38.384,6.883 38.481,6.883 38.786,6.883 38.964,6.706 38.996,6.673 39.147,6.673 39.176,6.702 39.326,6.702 39.391,6.637 39.391,6.486 39.287,6.382 39.183,6.278 39.183,6.127 39.247,6.063 39.398,6.063 39.502,6.167 39.607,6.271 39.757,6.271 39.822,6.206 39.822,6.055 39.718,5.951 39.614,5.847 39.614,5.696 39.678,5.632 39.829,5.632 39.933,5.736 40.038,5.84 40.189,5.84 40.253,5.775 40.253,5.624 40.149,5.52 40.045,5.416 40.045,5.265 40.109,5.201 40.26,5.201 40.365,5.305 40.469,5.409 40.62,5.409 40.684,5.344 40.684,5.193 40.655,5.165 40.655,5.014 40.945,4.724 41.123,4.547 41.123,4.267 41.123,4.221 41.229,4.115 41.27,4.115 41.377,4.008 41.377,3.917 41.27,3.81 41.123,3.81 40.975,3.81 40.869,3.703 40.869,3.612 40.975,3.505 41.123,3.505 41.27,3.505 41.377,3.399 41.377,3.307 41.27,3.2 41.123,3.2 40.975,3.2 40.869,3.094 40.869,3.002 40.975,2.896 41.123,2.896 41.27,2.896 41.377,2.789 41.377,2.697 41.27,2.591 41.229,2.591 41.123,2.484 41.123,1.93 41.123,1.295 P2.5
RIGHT_VCC: P1.21 P2.1 | length 19.9
  Top Layer w0.152: P1.21 30.25,5.437 35.687,0 P2.1
RIGHT_XCLK: P1.28 P2.8 | length 31.2
  Top Layer w0.152: P1.28 33.75,10.624 35.23,9.144 37.617,9.144 38.593,9.144 38.684,9.053 38.684,8.981 38.776,8.89 38.898,8.89 38.989,8.981 38.989,9.053 39.08,9.144 39.202,9.144 39.294,9.053 39.294,8.981 39.385,8.89 39.507,8.89 39.599,8.981 39.599,9.053 39.69,9.144 39.812,9.144 39.903,9.053 39.903,8.981 39.995,8.89 40.117,8.89 40.208,8.981 40.208,9.053 40.3,9.144 40.422,9.144 40.513,9.053 40.513,8.981 40.604,8.89 40.726,8.89 40.818,8.981 40.818,9.053 40.909,9.144 41.031,9.144 41.123,9.053 41.123,8.981 41.214,8.89 41.336,8.89 41.427,8.981 41.427,9.053 41.519,9.144 41.641,9.144 41.732,9.053 41.732,8.981 41.824,8.89 41.946,8.89 42.037,8.981 42.037,9.053 42.128,9.144 42.25,9.144 42.342,9.053 42.342,8.981 42.433,8.89 42.555,8.89 42.647,8.981 42.647,9.053 42.738,9.144 42.86,9.144 42.951,9.053 42.951,8.981 43.043,8.89 43.165,8.89 43.256,8.981 43.256,9.053 43.348,9.144 43.561,9.144 43.713,9.144 43.773,9.085 43.923,8.934 44.053,8.934 44.103,8.984 44.232,8.984 44.319,8.898 44.319,8.769 44.204,8.654 44.089,8.539 44.089,8.409 44.175,8.323 44.304,8.323 44.419,8.438 44.534,8.553 44.663,8.553 44.75,8.467 44.75,8.338 44.699,8.287 44.699,8.158 44.85,8.007 44.958,7.899 44.958,7.874 44.958,7.569 44.958,7.356 45.049,7.264 45.121,7.264 45.212,7.173 45.212,7.051 45.121,6.96 44.958,6.96 44.795,6.96 44.704,6.868 44.704,6.746 44.795,6.655 44.958,6.655 45.121,6.655 45.212,6.563 45.212,6.441 45.121,6.35 44.958,6.35 44.795,6.35 44.704,6.259 44.704,6.137 44.795,6.045 44.958,6.045 45.121,6.045 45.212,5.954 45.212,5.832 45.121,5.74 44.958,5.74 44.795,5.74 44.704,5.649 44.704,5.527 44.795,5.436 44.958,5.436 45.121,5.436 45.212,5.344 45.212,5.222 45.121,5.131 44.958,5.131 44.795,5.131 44.704,5.039 44.704,4.917 44.795,4.826 44.958,4.826 45.121,4.826 45.212,4.735 45.212,4.613 45.121,4.521 44.958,4.521 44.795,4.521 44.704,4.43 44.704,4.308 44.795,4.216 44.958,4.216 45.121,4.216 45.212,4.125 45.212,4.003 45.121,3.912 44.958,3.912 44.795,3.912 44.704,3.82 44.704,3.698 44.795,3.607 44.867,3.607 44.958,3.515 44.958,3.454 P2.8
pads on no net: P1.0

## Silkscreen, mask and mechanical layers (free items; w line width, h text height)
Top Overlay:
  drawing of 2268 lines, arcs and shapes, not listed
  text "JLCJLCJLCJLC" at 23.876,19.634 h1
  text "Connect V1_0" at 3.81,9.398 h0.8
  text "github.com/liuyang9609" at 3.81,7.264 h0.8
Mechanical 1:
  the board outline again, w0.254

## Text inside footprints (layer, text, board x,y; h text height)
P2: Top Overlay "VCC" at 36.097,-2.608 h1; Top Overlay "GND" at 36.1,4.225 h1
P3: Top Overlay "VCC" at -1.275,-2.6 h1; Top Overlay "GND" at -1.275,4.225 h1